# Altium PCB 28Pins_Project_v1I1_PCB.PcbDoc (part 1 of 2)
Units mm, origin at the board's own origin, x right, y up, seen from the top; angles counter-clockwise.
Board outline 68.58 x 53.34 mm, 2 copper layers (Top Layer, Bottom Layer); 106 components, 71 nets, 323 pads, 0 vias.
Unrouted connection lines stored in the file: 231.
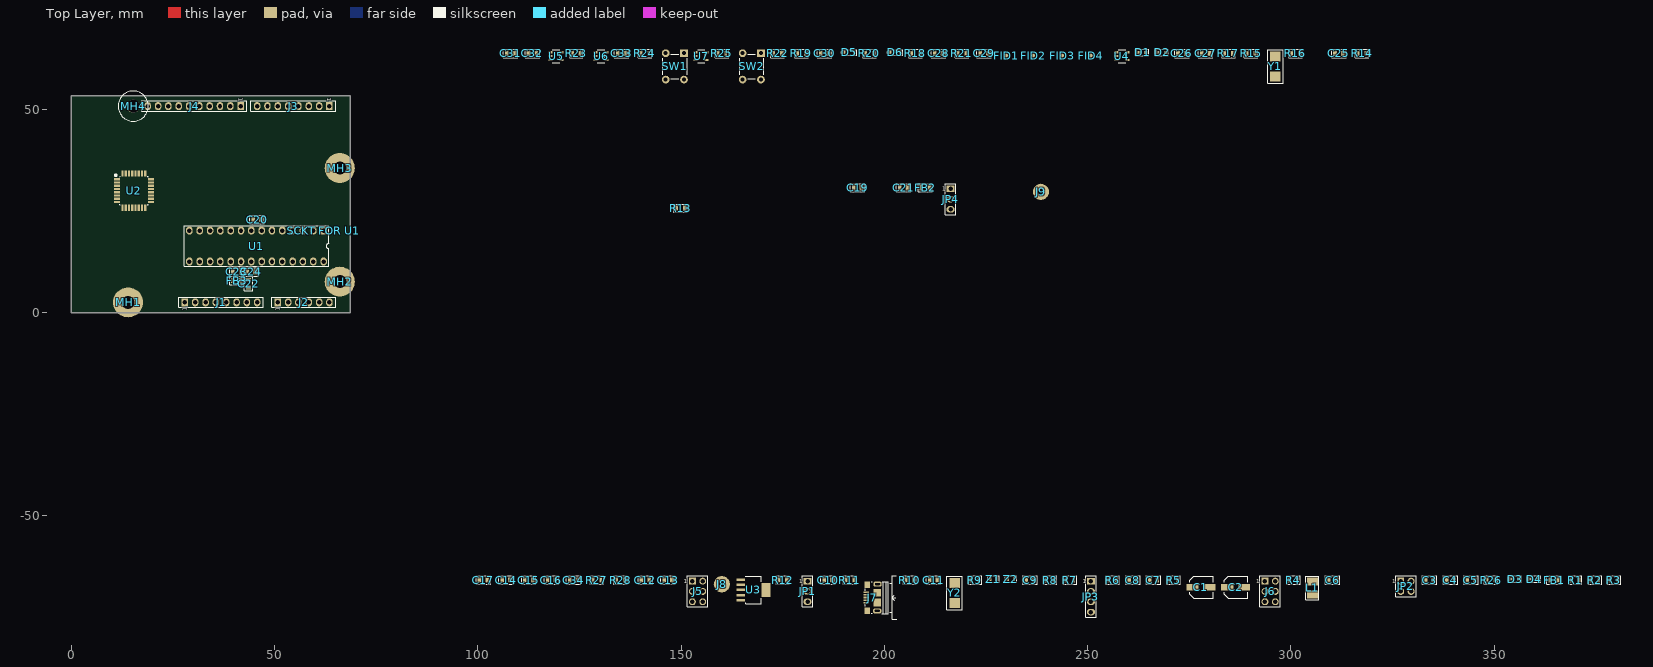
[diagram p0: Top Layer view]
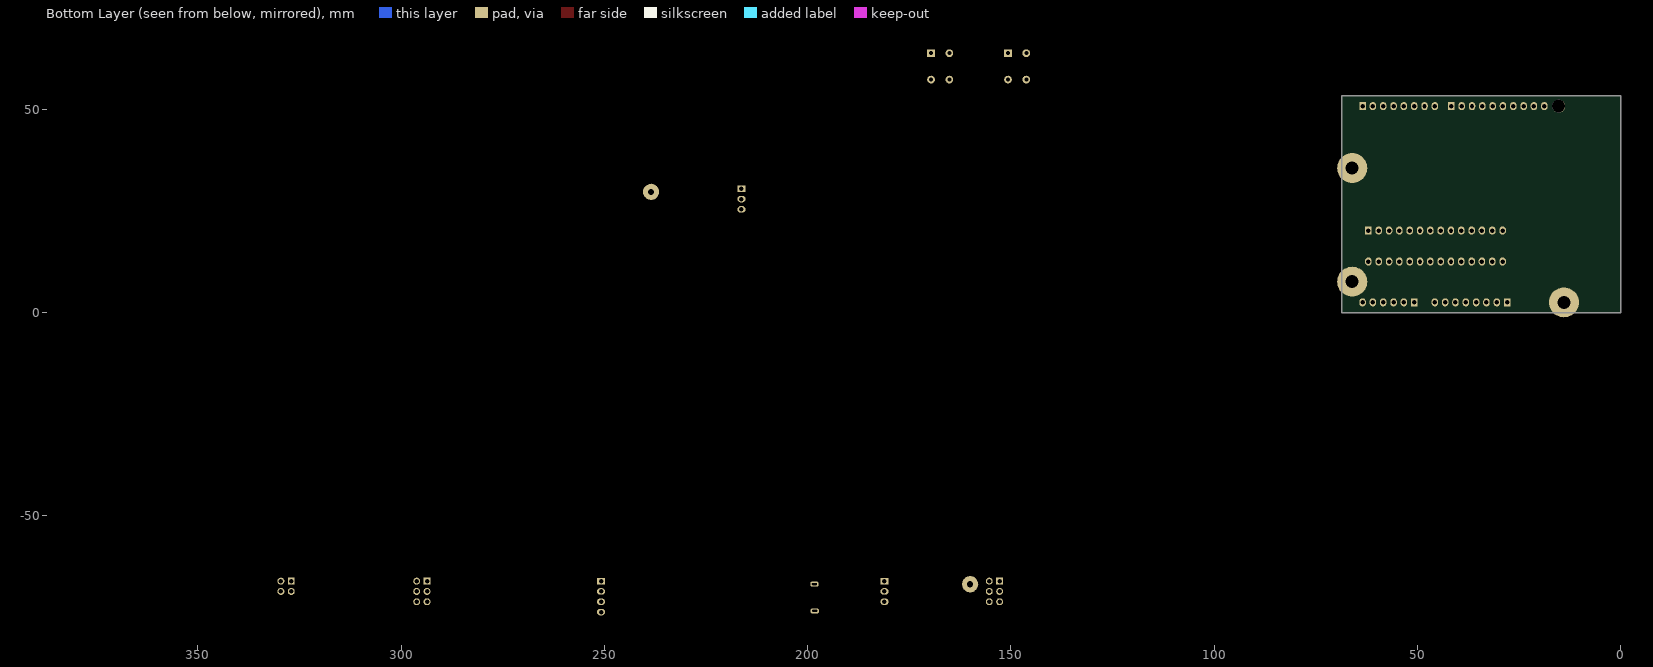
[diagram p1: Bottom Layer view, seen from below]

## Layer stack, top to bottom
Top Solder: solder mask 0.0102, Solder Resist, Dk 3.5
Top Layer: signal copper 0.0356
Dielectric 1: dielectric 0.32, FR-4, Dk 4.8
Bottom Layer: signal copper 0.0356
Bottom Solder: solder mask 0.0102, Solder Resist, Dk 3.5

## Board outline
0,0 68.58,0 68.58,53.34 0,53.34

## Design rules (kind name [scope] priority, off if disabled: settings)
Clearance [All] p1: gap=0.254 ignorepadtopadclearanceinfootprint=FALSE except(0: Arc-Hole Track-Hole SMDPad-Hole THPad-Hole Via-Hole Fill-Hole Poly-Hole Region-Hole Text-Hole)
PolygonConnect [All] p1: connectstyle=Relief reliefconductorwidth=0.254 reliefentries=4 polygonreliefangle="90 Angle" airgapwidth=0.254
RoutingVias [All] p1: holewidth=0.711 width=1.27 viastyle="Through Hole" minholewidth=0.711 minwidth=1.27 maxholewidth=0.711 maxwidth=1.27
SolderMaskExpansion [All] p1: expansion=0.102 istentingtop=FALSE
Width [All] p1: maxlimit=0.254 minlimit=0.254 preferedwidth=0.254
30 further rules are at their usual default settings.

## Components (designator, comment, footprint, x,y, rotation, side; value= is the part's Value field where it differs from the comment)
C1 "100u / 10V" C_ALU_C_SIZE 277.876,-67.564 r0 top
C2 "100u / 10V" C_ALU_C_SIZE 286.385,-67.564 r0 top
C3 "10uF / 16V" C0805 334.137,-65.786 r0 top
C4 "100n" C0805 339.217,-65.786 r0 top
C5 "100n" C0805 344.297,-65.786 r0 top
C6 "100n" C0805 310.261,-65.786 r0 top
C7 "1u" C0805 266.192,-65.786 r0 top
C8 "100n" C0805 261.112,-65.786 r0 top
C9 "18p" C0805 235.839,-65.786 r0 top
C10 "18p" C0805 186.182,-65.786 r0 top
C11 "100n" C0805 212.09,-65.786 r0 top
C12 "10uF / 16V" C0805 141.224,-65.786 r0 top
C13 "10uF / 16V" C0805 146.812,-65.786 r0 top
C14 "100n" C0805 106.934,-65.786 r0 top
C15 "100n" C0805 112.522,-65.786 r0 top
C16 "100n" C0805 118.11,-65.786 r0 top
C17 "100n" C0805 101.346,-65.786 r0 top
C19 "10uF / 16V" C0805 193.421,30.734 r0 top
C20 "100n" C0805 45.7,22.9 r0 top
C21 "10uF / 16V" C0805 204.724,30.734 r0 top
C22 "10uF / 16V" C0805 43.6,7.15 r90 top
C23 "100n" C0805 40.7,10 r0 top
C24 "100n" C0805 44.25,10 r0 top
C25 "18p" C0805 311.785,63.754 r0 top
C26 "100n" C0805 273.177,63.754 r0 top
C27 "18p" C0805 279.019,63.754 r0 top
C28 "100n" C0805 213.36,63.754 r0 top
C29 "100n" C0805 224.536,63.754 r0 top
C30 "100n" C0805 185.293,63.754 r0 top
C31 "100n" C0805 108.077,63.754 r0 top
C32 "100n" C0805 113.411,63.754 r0 top
C33 "100n" C0805 135.382,63.754 r0 top
C34 "10uF / 16V" C0805 123.571,-65.786 r0 top
D1 "Green" LED_0603 263.525,64.008 r0 top
D2 "Orange" LED_0603 268.351,64.008 r0 top
D3 "Orange" LED_0603 355.219,-65.532 r0 top
D4 "Orange" LED_0603 359.918,-65.532 r0 top
D5 "BAT54HT1G" SOD323 191.389,64.008 r0 top
D6 "BAT54HT1G" SOD323 202.692,64.008 r0 top
FB1 "MPZ2012S601AT000" C0805 364.744,-65.786 r0 top
FB2 "MPZ2012S601AT000" C0805 210.058,30.734 r0 top
FB3 "MPZ2012S601AT000" C0805 40.7,7.9 r0 top
FID1 "FID_1MMC" FID_40X120D 229.997,63.246 r0 top
FID2 "FID_1MMC" FID_40X120D 236.601,63.246 r90 top
FID3 "FID_1MMC" FID_40X120D 243.713,63.246 r90 top
FID4 "FID_1MMC" FID_40X120D 250.825,63.246 r90 top
J1 "HDR FMALE 1X8 2.54mm" Hdr_Fmale_1x8_2.54mm 27.94,2.54 r90 top locked
J2 "HDR FMALE 1x6 2.54mm" Hdr_Fmale_1x6_2.54mm 50.8,2.54 r90 top locked
J3 "HDR FMALE 1X8 2.54mm" Hdr_Fmale_1x8_2.54mm 63.5,50.8 r270 top locked
J4 "HDR FMALE 1X10 2.54mm" Hdr_Fmale_1x10_2.54mm 41.656,50.8 r270 top locked
J5 "HDR 2x3" HDR_2x3_2.54MM 152.781,-66.04 r0 top
J6 "HDR 2x3" HDR_2x3_2.54MM 293.624,-66.04 r0 top
J7 "10118193-0001LF" 10118193 195.58,-71.374 r90 top
J8 "4MMx1.5MM" PAD_WITH_HOLE_4MMx1.5MM 160.02,-66.802 r0 top
J9 "4MMx1.5MM" PAD_WITH_HOLE_4MMx1.5MM 238.506,29.718 r0 top
JP1 "HDR 1x3" Hdr_1x3_2.54mm 181.102,-66.04 r0 top
JP2 "HDR 2x2" HDR_2x2_2.54MM 327.025,-66.04 r0 top
JP3 "HDR 1x4" HDR_1x4_2.54MM 250.825,-66.04 r0 top
JP4 "HDR 1x3" Hdr_1x3_2.54mm 216.281,30.48 r0 top
L1 "2u2 / 2A" C1210_IND 305.308,-67.691 r90 top
MH1 "MH_7.4MMC_3.2MMD" MH_7.4MMD_3.2MMD 13.97,2.54 r0 top locked
MH2 "MH_7.4MMC_3.2MMD" MH_7.4MMD_3.2MMD 66.04,7.62 r0 top locked
MH3 "MH_7.4MMC_3.2MMD" MH_7.4MMD_3.2MMD 66.04,35.56 r0 top locked
MH4 "MH_7.4MMNC_3.2MMD" MH_7.4MMD_3.2MMD_NON_COPPER_NPTH 15.24,50.8 r0 top locked
R1 "100k" R0805 369.951,-65.786 r0 top
R2 "560R" R0805 374.777,-65.786 r0 top
R3 "560R" R0805 379.476,-65.786 r0 top
R4 "10k" R0805 300.609,-65.786 r0 top
R5 "22R" R0805 271.145,-65.786 r0 top
R6 "22R" R0805 256.159,-65.786 r0 top
R7 "22R" R0805 245.618,-65.786 r0 top
R8 "0R" R0805 240.792,-65.786 r0 top
R9 "1M" R0805 222.25,-65.786 r0 top
R10 "1k" R0805 206.248,-65.786 r0 top
R11 "1k" R0805 191.516,-65.786 r0 top
R12 "1k" R0805 175.006,-65.786 r0 top
R13 "22R" R0805 149.86,25.654 r0 top
R14 "10k" R0805 317.5,63.754 r0 top
R15 "560R" R0805 290.195,63.754 r0 top
R16 "1M" R0805 301.117,63.754 r0 top
R17 "560R" R0805 284.607,63.754 r0 top
R18 "10k" R0805 207.645,63.754 r0 top
R19 "10k" R0805 179.578,63.754 r0 top
R20 "10k" R0805 196.342,63.754 r0 top
R21 "10k" R0805 219.075,63.754 r0 top
R22 "560R" R0805 173.736,63.754 r0 top
R23 "22R" R0805 124.206,63.754 r0 top
R24 "22R" R0805 141.097,63.754 r0 top
R25 "22R" R0805 160.02,63.754 r0 top
R26 "0R" R0805 349.25,-65.786 r0 top
R27 "0R" R0805 129.286,-65.786 r0 top
R28 "0R" R0805 135.128,-65.786 r0 top
"SCKT FOR U1" "28-DIP Socket" 28_DIP_7.62MM_SOCKET 62.065,20.193 r270 top locked
SW1 "1825910-6" 1825910-6 148.463,60.579 r0 top
SW2 "1825910-6" 1825910-6 167.386,60.579 r0 top
U1 "Component_1" 28_DIP_7.62MM 62.065,20.193 r270 top locked
U2 "ATMEGA16U2-AU" TQFP32 15.4,30 r0 top locked
U3 "TL1963A-33DCQR" "DCQ (R-PDSO-G6)" 167.767,-68.199 r0 top
U4 "SN74AHC1G09DBVR*" DBV_SOT_23_5 258.445,63.119 r0 top
U5 "SN74AHC1G09DBVR*" DBV_SOT_23_5 119.253,63.119 r0 top
U6 "SN74AHC1G09DBVR*" DBV_SOT_23_5 130.302,63.119 r0 top
U7 "SN74AHC1G09DBVR*" DBV_SOT_23_5 154.94,63.119 r0 top
Y1 "ABM7-16.000MHZ-D2Y-T" ABM7_v1_1_BIG 296.164,60.579 r90 top
Y2 "ABM7-16.000MHZ-D2Y-T" ABM7_v1_1_BIG 217.297,-68.961 r90 top
Z1 "CG0603MLC-05E" R0603 226.822,-65.532 r0 top
Z2 "CG0603MLC-05E" R0603 231.14,-65.532 r0 top

## Footprints (in the part's own frame and the unit in brackets; to place one, negate y for a bottom-side part, rotate by r counter-clockwise, add the part's x,y. Pads: shape width x height; smd on the part's side, far side on the other; paste and mask are expansions set on the pad)
28_DIP_7.62MM [mm]
  rect 2x1.6 hole 1.1: 1(0,0)
  oval 2x1.6 hole 1.1: 2(0,-2.54) 3(0,-5.08) 4(0,-7.62) 5(0,-10.16) 6(0,-12.7) 7(0,-15.24) 8(0,-17.78) 9(0,-20.32) 10(0,-22.86) 11(0,-25.4) 12(0,-27.94) 13(0,-30.48) 14(0,-33.02) 15(7.62,-33.02) 16(7.62,-30.48) 17(7.62,-27.94) 18(7.62,-25.4) 19(7.62,-22.86) 20(7.62,-20.32) 21(7.62,-17.78) 22(7.62,-15.24) 23(7.62,-12.7) 24(7.62,-10.16) 25(7.62,-7.62) 26(7.62,-5.08) 27(7.62,-2.54) 28(7.62,0)
  silkscreen extent -1.19,-34.31 8.81,1.29, body extent -0.13,-34.41 7.75,1.53, height 7.55
28_DIP_7.62MM_SOCKET [mm]
  body extent -1.24,-34.16 8.86,1.34, height 4.2
1825910-6 [mm]
  rect 1.9x1.9 hole 1: 1(2.25,3.25)
  round 1.9 hole 1: 2(2.25,-3.25) 3(-2.25,3.25) 4(-2.25,-3.25)
  silkscreen extent -3,-3 3,3, body extent -2.99,-3.8 3,4, height 5
10118193 [mm]
  rect 0.4x1.35 smd mask+0.05: 1(0,0) 2(0.65,0) 3(1.3,0) 4(1.95,0) 5(2.6,0)
  rect 1.6x1.4 smd: 6(-1.9,-0.225) 7(4.5,-0.225)
  rrect60% 1.2x2 hole 0.5 slot 1.2 at 90 deg: 8(-2,-2.675) 9(4.6,-2.765)
  rect 1.9x1.9 smd: 10(0.1,-2.675) 11(2.5,-2.675)
  silkscreen extent -4.1,-7.5 6.6,0.3, body extent -2.63,-5.41 5.23,0.25, height 2.87
ABM7_v1_1_BIG [mm]
  rect 2.5x2.6 smd: 1(-2.45,0) 2(2.45,0)
  silkscreen extent -4.1,-1.9 4.1,1.9, body extent -3,-1.75 3,1.75, height 1.45
C0805 [mm]
  rect 0.9x1.3 smd: 1(-0.95,0) 2(0.95,0)
  silkscreen extent -1.78,-1.02 1.78,1.02, body extent -1,-0.6 1,0.6, height 1.45
C1210_IND [mm]
  rect 2x2.7 smd: 1(-1.6,0) 2(1.6,0)
  silkscreen extent -2.9,-1.6 2.9,1.6, body extent -1.6,-1.25 1.6,1.25, height 2.7
C_ALU_C_SIZE [mm]
  rect 3x1.6 smd: 1(-2.05,0) 2(2.05,0)
  silkscreen extent -2.75,-2.75 3,2.75, body extent -2.95,-2.65 2.95,2.65, height 5.41
DBV_SOT_23_5 [mm]
  rect 1x0.55 smd: 1(-1.35,0.95) 2(-1.35,0) 3(-1.35,-0.95) 4(1.35,-0.95) 5(1.35,0.95)
  silkscreen extent -0.9,-1.6 0.9,1.6, body extent -1.51,-1.52 1.51,1.53, height 1.61
"DCQ (R-PDSO-G6)" [mm]
  rect 2.2x0.6 smd: 1(-3.1,2.54) 2(-3.1,1.27) 3(-3.1,0) 4(-3.1,-1.27) 5(-3.1,-2.54)
  rect 2.2x3.5 smd: 6(3.1,0)
  silkscreen extent -1.9,-3.4 1.9,3.4, body extent -3.63,-3.28 3.63,3.28, height 1.79
FID_40X120D [mil]
  round 40 smd paste-1574.8 mask+40: 1(0,0)
Hdr_1x3_2.54mm [mm]
  rect 2x1.6 hole 1.1: 1(0,0)
  oval 2x1.6 hole 1.1: 2(0,-2.54) 3(0,-5.08)
  silkscreen extent -1.27,-6.35 1.27,1.27, body extent -1.2,-6.15 1.2,1.07, height 8.39
HDR_1x4_2.54MM [mm]
  rect 2x1.6 hole 1.1: 1(0,0)
  oval 2x1.6 hole 1.1: 2(0,-2.54) 3(0,-5.08) 4(0,-7.62)
  silkscreen extent -1.27,-8.89 1.27,1.27, body extent -1.2,-8.69 1.2,1.07, height 8.39
HDR_2x2_2.54MM [mm]
  rect 1.7x1.7 hole 1.1: 1(0,0)
  round 1.7 hole 1.1: 2(2.54,0) 3(0,-2.54) 4(2.54,-2.54)
  silkscreen extent -1.27,-3.81 3.81,1.27, body extent -1.23,-3.81 3.77,1.27, height 8.01
HDR_2x3_2.54MM [mm]
  rect 1.7x1.7 hole 1.1: 1(0,0)
  round 1.7 hole 1.1: 2(2.54,0) 3(0,-2.54) 4(2.54,-2.54) 5(0,-5.08) 6(2.54,-5.08)
  silkscreen extent -1.27,-6.35 3.81,1.27, body extent -1.23,-6.35 3.77,1.27, height 8.01
Hdr_Fmale_1x6_2.54mm [mm]
  rect 2x1.6 hole 1.1: 1(0,0)
  oval 2x1.6 hole 1.1: 2(0,-2.54) 3(0,-5.08) 4(0,-7.62) 5(0,-10.16) 6(0,-12.7)
  silkscreen extent -1.27,-14.22 1.27,1.52, body extent -1.25,-14.17 1.25,1.47, height 8.51
Hdr_Fmale_1x8_2.54mm [mm]
  rect 2x1.6 hole 1.1: 1(0,0)
  oval 2x1.6 hole 1.1: 2(0,-2.54) 3(0,-5.08) 4(0,-7.62) 5(0,-10.16) 6(0,-12.7) 7(0,-15.24) 8(0,-17.78)
  silkscreen extent -1.27,-19.3 1.27,1.52, body extent -1.25,-19.25 1.25,1.47, height 8.51
Hdr_Fmale_1x10_2.54mm [mm]
  rect 2x1.6 hole 1.1: 1(0,0)
  oval 2x1.6 hole 1.1: 2(0,-2.54) 3(0,-5.08) 4(0,-7.62) 5(0,-10.16) 6(0,-12.7) 7(0,-15.24) 8(0,-17.78) 9(0,-20.32) 10(0,-22.86)
  silkscreen extent -1.27,-24.33 1.27,1.52, body extent -1.25,-24.33 1.25,1.47, height 8.51
LED_0603 [mm]
  rect 0.8x0.8 smd: 1(-0.8,0) 2(0.8,0)
  silkscreen extent -1.78,-0.76 1.52,0.76, body extent -0.85,-0.4 0.85,0.4, height 0.66
MH_7.4MMD_3.2MMD [mm]
  round 7.4 hole 3.2: 1(0,0)
MH_7.4MMD_3.2MMD_NON_COPPER_NPTH [mm]
  round 3.2 hole 3.2 unplated: 1(0,0)
  silkscreen extent -3.7,-3.7 3.7,3.7
PAD_WITH_HOLE_4MMx1.5MM [mm]
  round 4 hole 1.5: 1(0,0)
R0603 [mm]
  rect 0.6x0.9 smd: 1(-0.75,0) 2(0.75,0)
  silkscreen extent -1.4,-0.76 1.4,0.76, body extent -0.8,-0.4 0.8,0.4, height 0.85
R0805 [mm]
  rect 0.7x1.3 smd: 1(-0.95,0) 2(0.95,0)
  silkscreen extent -1.65,-1.02 1.65,1.02, body extent -1,-0.6 1,0.6, height 0.71
SOD323 [mil]
  rect 22x27 smd: 1(-48,0) 2(48,0)
  silkscreen extent -79,-28 71,28, body extent -49,-25 49,25, height 39
TQFP32 [mm]
  rect 1.5x0.55 smd mask+0.06: 1(-4.2,2.8) 2(-4.2,2) 3(-4.2,1.2) 4(-4.2,0.4) 5(-4.2,-0.4) 6(-4.2,-1.2) 7(-4.2,-2) 8(-4.2,-2.8) 17(4.2,-2.8) 18(4.2,-2) 19(4.2,-1.2) 20(4.2,-0.4) 21(4.2,0.4) 22(4.2,1.2) 23(4.2,2) 24(4.2,2.8)
  rect 0.55x1.5 smd mask+0.06: 9(-2.8,-4.2) 10(-2,-4.2) 11(-1.2,-4.2) 12(-0.4,-4.2) 13(0.4,-4.2) 14(1.2,-4.2) 15(2,-4.2) 16(2.8,-4.2) 25(2.8,4.2) 26(2,4.2) 27(1.2,4.2) 28(0.4,4.2) 29(-0.4,4.2) 30(-1.2,4.2) 31(-2,4.2) 32(-2.8,4.2)
  silkscreen extent -4.65,-3.5 3.5,4, body extent -4.6,-4.6 4.6,4.6, height 1.2

## Part data
C1 C2: library part EEE-1AA101WR, "CAP ALUM 100UF 20% 10V SMD", Capacitance=100uF, Case/Package=Radial, Manufacturer=Panasonic, Max Operating Temperature=85°C, Min Operating Temperature=-40°C, Package Quantity=1, Ripple Current=50mA, Supplier Part Number 1=PCE3867CT-ND, Tolerance=20%, Voltage Rating=10V, Category="Aluminum Electrolytic Capacitors", ComponentLink1Description=https://datasheet.ciiva.com/26945/getdatasheetpartid-169213-26945071.pdf?src-supplier=Verical, ComponentLink1URL=https://datasheet.ciiva.com/26945/getdatasheetpartid-169213-26945071.pdf?src-supplier=Verical, ComponentLink2Description=https://datasheet.ciiva.com/2983/aba0000ce2-2983906.pdf?src-supplier=Avnet, ComponentLink2URL=https://datasheet.ciiva.com/2983/aba0000ce2-2983906.pdf?src-supplier=Avnet, ComponentLink3Description=https://datasheet.ciiva.com/11673/aba0000ce2-11673882.pdf?src-supplier=Avnet, ComponentLink3URL=https://datasheet.ciiva.com/11673/aba0000ce2-11673882.pdf?src-supplier=Avnet, ComponentLink4Description=https://datasheet.ciiva.com/24027/aba0000ce2-40801-24027541.pdf?src-supplier=Mouser, ComponentLink4URL=https://datasheet.ciiva.com/24027/aba0000ce2-40801-24027541.pdf?src-supplier=Mouser, ComponentLink5Description=https://datasheet.ciiva.com/30075/11aba0000ce2-30075303.pdf?src-supplier=Onlinecomponents.com, ComponentLink5URL=https://datasheet.ciiva.com/30075/11aba0000ce2-30075303.pdf?src-supplier=Onlinecomponents.com, ComponentLink6Description=https://datasheet.ciiva.com/16427/aba0000ce2-16427544.pdf?src-supplier=Future+Electronics, ComponentLink6URL=https://datasheet.ciiva.com/16427/aba0000ce2-16427544.pdf?src-supplier=Future+Electronics, ComponentLink7Description=https://datasheet.ciiva.com/14598/70255710-14598233.pdf?src-supplier=Allied+Electronics, ComponentLink7URL=https://datasheet.ciiva.com/14598/70255710-14598233.pdf?src-supplier=Allied+Electronics, ComponentLink8Description=https://datasheet.ciiva.com/14605/70255710-14605689.pdf?src-supplier=Allied+Electronics, ComponentLink8URL=https://datasheet.ciiva.com/14605/70255710-14605689.pdf?src-supplier=Allied+Electronics, Construction=Cylindrical, Contact Plating=Tin, Diameter=5mm, Height=5.4mm, Height - Seated (Max)=0.213inch, Lead Free="Lead Free", Length=5.5mm, Life (Hours)=1000Hour, Manufacturer Part Number=EEE-1AA101WR, Mount="Surface Mount,PCB", Packaging="Tape and Reel", Pricing 1="1=0,39000, 10=0,26600, 50=0,17720, 100=0,15050, 500=0,10626 (USD)", Radiation Hardening=No, REACH SVHC=Unknown, Ripple Current (AC)=50mA, RoHS=Yes, RoHS Compliant=Yes, Series=S, Supplier 1=Digi-Key, Termination=SMD/SMT, Voltage Rating (DC)=10V
C3 C12 C13 C19 C21 C22 C34: library part C2012X5R1C106M125AC, "CAP CER 10UF 16V X5R 0805", Capacitance=10uF, Case Code (Imperial)=0805, Case Code (Metric)=2012, Dielectric=X5R, Dielectric Material=Ceramic, Manufacturer=TDK, Max Operating Temperature=85°C, Min Operating Temperature=-55°C, Package Quantity=1, Supplier Part Number 1=445-4115-1-ND, Tolerance=20%, Voltage Rating=16V, Case/Package=0805, Category="Ceramic Capacitors", ComponentLink1Description=https://datasheet.ciiva.com/6252/tdkmlcccaprange-6252105.pdf?src-supplier=Digi-Key, ComponentLink1URL=https://datasheet.ciiva.com/6252/tdkmlcccaprange-6252105.pdf?src-supplier=Digi-Key, ComponentLink2Description=https://datasheet.ciiva.com/6252/tdkmlcccaprange-6252108.pdf?src-supplier=Digi-Key, ComponentLink2URL=https://datasheet.ciiva.com/6252/tdkmlcccaprange-6252108.pdf?src-supplier=Digi-Key, ComponentLink3Description=https://datasheet.ciiva.com/6289/tdkmlcccaprange-6289238.pdf?src-supplier=Digi-Key, ComponentLink3URL=https://datasheet.ciiva.com/6289/tdkmlcccaprange-6289238.pdf?src-supplier=Digi-Key, ComponentLink4Description=https://datasheet.ciiva.com/22725/1913358-22725558.pdf?src-supplier=Element14, ComponentLink4URL=https://datasheet.ciiva.com/22725/1913358-22725558.pdf?src-supplier=Element14, ComponentLink5Description=https://datasheet.ciiva.com/23803/1796654-23803022.pdf?src-supplier=Newark, ComponentLink5URL=https://datasheet.ciiva.com/23803/1796654-23803022.pdf?src-supplier=Newark, Depth=1.25mm, Height=1.25mm, Lead Free="Lead Free", Length=0.079inch, Manufacturer Part Number=C2012X5R1C106M125AC, Mount="Surface Mount", Number of Pins=2, Packaging="Tape and Reel", REACH SVHC="No SVHC", Resistor Type=Ceramic, RoHS=Yes, RoHS Compliant=Yes, Series=C, Supplier 1=Digi-Key, Termination=SMD/SMT, Thickness=0.057inch, Voltage Rating (DC)=16V, Weight=0.000194oz, Width=0.049inch
C4 C5 C6 C8 C11 C14 C15 C16 C17 C20 C23 C24 C26 C28 C29 C30 C31 C32 C33: library part C2012X7R1H104K085AA, "CAP CER 0.1UF 50V X7R 0805", Capacitance=100nF, Case Code (Imperial)=0805, Case Code (Metric)=2012, Dielectric=X7R, Dielectric Material=Ceramic, Manufacturer 1=TDK, Max Operating Temperature=125°C, Min Operating Temperature=-55°C, Package Quantity=1, Supplier Part Number 1=445-7534-1-ND, Tolerance=10%, Voltage=50V, Case/Package=0805, ComponentLink1Description=https://datasheet.ciiva.com/11788/0900766b80c1bb00-11788128.pdf?src-supplier=RSComponents, ComponentLink1URL=https://datasheet.ciiva.com/11788/0900766b80c1bb00-11788128.pdf?src-supplier=RSComponents, ComponentLink2Description=https://datasheet.ciiva.com/6250/tdkmlcccaprange-6250821.pdf?src-supplier=Digi-Key, ComponentLink2URL=https://datasheet.ciiva.com/6250/tdkmlcccaprange-6250821.pdf?src-supplier=Digi-Key, ComponentLink3Description=https://datasheet.ciiva.com/6250/tdkmlcccaprange-6250824.pdf?src-supplier=Digi-Key, ComponentLink3URL=https://datasheet.ciiva.com/6250/tdkmlcccaprange-6250824.pdf?src-supplier=Digi-Key, ComponentLink4Description=https://datasheet.ciiva.com/24191/e412-c-24191447.pdf?src-supplier=Future+Electronics, ComponentLink4URL=https://datasheet.ciiva.com/24191/e412-c-24191447.pdf?src-supplier=Future+Electronics, ComponentLink5Description=https://datasheet.ciiva.com/23803/1796654-23803035.pdf?src-supplier=Newark, ComponentLink5URL=https://datasheet.ciiva.com/23803/1796654-23803035.pdf?src-supplier=Newark, ComponentLink6Description=https://datasheet.ciiva.com/28602/1571323-28602204.pdf?src-supplier=Element14, ComponentLink6URL=https://datasheet.ciiva.com/28602/1571323-28602204.pdf?src-supplier=Element14, Construction=Flat, Depth=1.25mm, Height=0.85mm, Lead Free="Lead Free", Length=2mm, Manufacturer Part Number 1=C2012X7R1H104K085AA, Mount="Surface Mount", Number of Pins=2, Packaging="Tape and Reel", Pricing 1="1=0.15000, 10=0.10900, 50=0.06160, 100=0.05100, 500=0.03578, 1000=0.02962 (USD)", Radiation Hardening=No, REACH SVHC="No SVHC", Resistor Type=Ceramic, RoHS=Yes, RoHS Compliant=Yes, Series=C, Stock 1=36530, Supplier 1=Digi-Key, Termination=SMD/SMT, Thickness=0.037inch, Voltage Rating=50V, Voltage Rating (DC)=50V, Weight=0.000194oz, Width=0.049inch
C7: library part C2012X5R1E105K125AA, "CAP CER 1UF 25V X5R 0805", Capacitance=1uF, Case Code (Imperial)=0805, Case Code (Metric)=2012, Dielectric=X5R, Dielectric Material=Ceramic, Manufacturer=TDK, Max Operating Temperature=85°C, Min Operating Temperature=-55°C, Package Quantity=2000, Supplier Part Number 1=445-1419-1-ND, Tolerance=10%, Voltage=25V, Case/Package=0805, Category="Ceramic Capacitors", ComponentLink1Description=https://datasheet.ciiva.com/11787/0900766b80c1bb00-11787608.pdf?src-supplier=RSComponents, ComponentLink1URL=https://datasheet.ciiva.com/11787/0900766b80c1bb00-11787608.pdf?src-supplier=RSComponents, ComponentLink2Description=https://datasheet.ciiva.com/28602/1744655-28602171.pdf?src-supplier=Element14, ComponentLink2URL=https://datasheet.ciiva.com/28602/1744655-28602171.pdf?src-supplier=Element14, ComponentLink3Description=https://datasheet.ciiva.com/15192/getdatasheetpartid-726707-15192140.pdf?src-supplier=Verical, ComponentLink3URL=https://datasheet.ciiva.com/15192/getdatasheetpartid-726707-15192140.pdf?src-supplier=Verical, ComponentLink4Description=https://datasheet.ciiva.com/16449/e412-c-16449595.pdf?src-supplier=Future+Electronics, ComponentLink4URL=https://datasheet.ciiva.com/16449/e412-c-16449595.pdf?src-supplier=Future+Electronics, Construction=Flat, Depth=1.25mm, Height=1.25mm, Lead Free="Lead Free", Length=2mm, Manufacturer Part Number=C2012X5R1E105K125AA, Mount="Surface Mount", Number of Pins=2, Packaging="Tape and Reel", Pricing 1="1=0,24000, 10=0,16600, 50=0,09940, 100=0,08390, 500=0,05740, 1000=0,05078 (USD)", Radiation Hardening=No, REACH SVHC="No SVHC", Resistor Type=Ceramic, RoHS=Yes, RoHS Compliant=Yes, Series=C, Stock 1=14275, Supplier 1=Digi-Key, Termination=SMD/SMT, Thickness=0.057inch, Voltage Rating=25V, Voltage Rating (DC)=25V, Weight=0.000194oz, Width=0.049inch
C9 C10 C25 C27: library part C0805C180J5GACTU, "CAP CER 18PF 50V C0G/NP0 0805", Capacitance=18pF, Case Code (Imperial)=0805, Case Code (Metric)=2012, Dielectric=C0G, Dielectric Material=Ceramic, Manufacturer=KEMET, Max Operating Temperature=125°C, Min Operating Temperature=-55°C, Package Quantity=1, Supplier Part Number 1=399-1112-1-ND, Temperature Coefficient=30ppm/°C, Tolerance=5%, Voltage=50V, Case/Package=0805, Category="Ceramic Capacitors", ComponentLink1Description=https://datasheet.ciiva.com/22746/1769375-22746770.pdf?src-supplier=Element14, ComponentLink1URL=https://datasheet.ciiva.com/22746/1769375-22746770.pdf?src-supplier=Element14, ComponentLink2Description=https://datasheet.ciiva.com/26923/getdatasheetpartid-759702-26923980.pdf?src-supplier=Verical, ComponentLink2URL=https://datasheet.ciiva.com/26923/getdatasheetpartid-759702-26923980.pdf?src-supplier=Verical, ComponentLink3Description=https://datasheet.ciiva.com/26847/getdatasheetpartid-385668-26847862.pdf?src-supplier=Verical, ComponentLink3URL=https://datasheet.ciiva.com/26847/getdatasheetpartid-385668-26847862.pdf?src-supplier=Verical, Construction=Flat, Contact Material=Tin, Contact Plating=Tin,Matte, Depth=1.25mm, Dissipation Factor=0.1%, Height=0.78mm, Lead Free="Lead Free", Lead Pitch=0.75mm, Length=2mm, Manufacturer Part Number=C0805C180J5GACTU, Mount="Surface Mount,PCB", Number of Pins=2, Packaging="Tape and Reel", Pricing 1="1=0,13000, 10=0,09000, 50=0,05140, 100=0,04250, 500=0,02982, 1000=0,02468 (USD)", Radiation Hardening=No, REACH SVHC="No SVHC", RoHS=Yes, RoHS Compliant=Yes, Series=C, Stock 1=9655, Supplier 1=Digi-Key, Termination=SMD/SMT, Thickness=0.035inch, Voltage Rating=50V, Voltage Rating (DC)=50V, Width=1.2mm
D1: library part LGL29K-G2J1-24-Z, "LED GREEN DIFFUSED 0603 SMD", Case Code (Imperial)=0603, Case Code (Metric)=1608, Forward Current=20mA, Forward Voltage=2.2V, Lens Color=White, Manufacturer="Osram Opto", Max Operating Temperature=100°C, Min Operating Temperature=-40°C, Package Quantity=5000, Reverse Voltage=12V, Supplier Part Number 1=475-2709-1-ND, Test Current=2mA, Case/Package=0603, Category=Uncategorized, Color=Green, ComponentLink1Description=https://datasheet.ciiva.com/4689/g-l29k-39844-4689584.pdf?src-supplier=Mouser, ComponentLink1URL=https://datasheet.ciiva.com/4689/g-l29k-39844-4689584.pdf?src-supplier=Mouser, ComponentLink2Description=https://datasheet.ciiva.com/15198/getdatasheetpartid-571127-15198411.pdf?src-supplier=Verical, ComponentLink2URL=https://datasheet.ciiva.com/15198/getdatasheetpartid-571127-15198411.pdf?src-supplier=Verical, ComponentLink3Description=https://datasheet.ciiva.com/2112/00077107-0-2112886.pdf?src-supplier=Digi-Key, ComponentLink3URL=https://datasheet.ciiva.com/2112/00077107-0-2112886.pdf?src-supplier=Digi-Key, ComponentLink4Description=https://datasheet.ciiva.com/2112/00077107-0-2112887.pdf?src-supplier=Digi-Key, ComponentLink4URL=https://datasheet.ciiva.com/2112/00077107-0-2112887.pdf?src-supplier=Digi-Key, ComponentLink5Description=https://datasheet.ciiva.com/2112/00077107-0-2112888.pdf?src-supplier=Digi-Key, ComponentLink5URL=https://datasheet.ciiva.com/2112/00077107-0-2112888.pdf?src-supplier=Digi-Key, Depth=0.8mm, Dominant Wavelength=570nm, Height=0.65mm, Illumination Color=Green, Length=1.3mm, Lens Size=0.8mm, Lens Style=Flat,Diffused,Colorless,Rectangular, Lens Transparency=Diffused, Luminous Flux=0.012lm, Luminous Intensity=5.6mcd, Manufacturer Part Number=LGL29K-G2J1-24-Z, Mount="Surface Mount", Number of Elements=1, Number of LEDs=1, Number of Pins=2, Packaging="Tape and Reel", Pricing 1="1=0.47000, 10=0.31000, 100=0.20710, 500=0.14322, 1000=0.11936, 2000=0.10742 (USD)", Radiation Hardening=No, RoHS=Yes, RoHS Compliant=Yes, Series=SmartLED, Supplier 1=Digi-Key, Viewing Angle=160°, Width=0.8mm
D2 D3 D4: library part LOL29K-H2K1-24-Z, "LED ORANGE DIFFUSED 0603 SMD", Case Code (Imperial)=0603, Case Code (Metric)=1608, Forward Current=20mA, Forward Voltage=2.2V, Lens Color=White, Manufacturer="Osram Opto", Max Operating Temperature=100°C, Min Operating Temperature=-40°C, Package Quantity=5000, Reverse Voltage=12V, Supplier Part Number 1=475-2740-1-ND, Test Current=2mA, Case/Package=0603, Category=Uncategorized, Color=Orange, ComponentLink1Description=https://datasheet.ciiva.com/2112/00077105-0-2112905.pdf?src-supplier=Digi-Key, ComponentLink1URL=https://datasheet.ciiva.com/2112/00077105-0-2112905.pdf?src-supplier=Digi-Key, ComponentLink2Description=https://datasheet.ciiva.com/2112/00077105-0-2112904.pdf?src-supplier=Digi-Key, ComponentLink2URL=https://datasheet.ciiva.com/2112/00077105-0-2112904.pdf?src-supplier=Digi-Key, ComponentLink3Description=https://datasheet.ciiva.com/2112/00077105-0-2112906.pdf?src-supplier=Digi-Key, ComponentLink3URL=https://datasheet.ciiva.com/2112/00077105-0-2112906.pdf?src-supplier=Digi-Key, ComponentLink4Description=https://datasheet.ciiva.com/15198/getdatasheetpartid-693885-15198412.pdf?src-supplier=Verical, ComponentLink4URL=https://datasheet.ciiva.com/15198/getdatasheetpartid-693885-15198412.pdf?src-supplier=Verical, Depth=0.8mm, Dominant Wavelength=606nm, Height=0.65mm, Illumination Color=Orange, Length=1.3mm, Lens Size=0.8mm, Lens Style=Flat,Diffused,Colorless,Rectangular, Lens Transparency=Diffused, Luminous Flux=0.025lm, Luminous Intensity=9mcd, Manufacturer Part Number=LOL29K-H2K1-24-Z, Mount="Surface Mount", Number of Elements=1, Number of LEDs=1, Number of Pins=2, Packaging="Tape and Reel", Radiation Hardening=No, RoHS=Yes, RoHS Compliant=Yes, Series=SmartLED, Supplier 1=Digi-Key, Viewing Angle=160°, Width=0.8mm
D5 D6: "DIODE SCHOTTKY 30V 200MA SOD3223", Average Rectified Current=200mA, Capacitance=10pF, Forward Voltage=800mV, Manufacturer="ON Semiconductor / Fairchild", Max Forward Surge Current (Ifsm)=600mA, Max Operating Temperature=150°C, Max Repetitive Reverse Voltage (Vrrm)=30V, Max Reverse Current=2uA, Min Operating Temperature=-55°C, Package Quantity=3000, Power Dissipation=200mW, Supplier Part Number 1=BAT54HT1GCT-ND, Category="Schottky Diodes", ComponentLink1Description=https://datasheet.ciiva.com/4714/bat54ht1-d-72881-4714706.pdf?src-supplier=Mouser, ComponentLink1URL=https://datasheet.ciiva.com/4714/bat54ht1-d-72881-4714706.pdf?src-supplier=Mouser, ComponentLink2Description=https://datasheet.ciiva.com/1240/1747983-1240762.pdf?src-supplier=Newark, ComponentLink2URL=https://datasheet.ciiva.com/1240/1747983-1240762.pdf?src-supplier=Newark, ComponentLink3Description=https://datasheet.ciiva.com/30479/0900766b811a63a9-30479442.pdf?src-supplier=RSComponents, ComponentLink3URL=https://datasheet.ciiva.com/30479/0900766b811a63a9-30479442.pdf?src-supplier=RSComponents, ComponentLink4Description=https://datasheet.ciiva.com/4452/bat54ht1g-104602-4452889.pdf?src-supplier=Mouser, ComponentLink4URL=https://datasheet.ciiva.com/4452/bat54ht1g-104602-4452889.pdf?src-supplier=Mouser, ComponentLink5Description=https://datasheet.ciiva.com/34301/806549-34301562.pdf?src-supplier=Jameco, ComponentLink5URL=https://datasheet.ciiva.com/34301/806549-34301562.pdf?src-supplier=Jameco, ComponentLink6Description=https://datasheet.ciiva.com/915/bat54ht1-d-915445.pdf?src-supplier=Digi-Key, ComponentLink6URL=https://datasheet.ciiva.com/915/bat54ht1-d-915445.pdf?src-supplier=Digi-Key, ComponentLink7Description=https://datasheet.ciiva.com/8294/bat54ht1-d-8294645.pdf?src-supplier=Avnet, ComponentLink7URL=https://datasheet.ciiva.com/8294/bat54ht1-d-8294645.pdf?src-supplier=Avnet, ComponentLink8Description=https://datasheet.ciiva.com/8303/bat54ht1g-8303645.pdf?src-supplier=Avnet, ComponentLink8URL=https://datasheet.ciiva.com/8303/bat54ht1g-8303645.pdf?src-supplier=Avnet, ComponentLink9Description=https://datasheet.ciiva.com/915/bat54ht1-d-915443.pdf?src-supplier=Digi-Key, ComponentLink9URL=https://datasheet.ciiva.com/915/bat54ht1-d-915443.pdf?src-supplier=Digi-Key, ComponentLink10Description=https://datasheet.ciiva.com/17020/bat54ht1g-17020445.pdf?src-supplier=Future+Electronics, ComponentLink10URL=https://datasheet.ciiva.com/17020/bat54ht1g-17020445.pdf?src-supplier=Future+Electronics, ComponentLink11Description=https://datasheet.ciiva.com/910/bat54ht1g-910499.pdf?src-supplier=Digi-Key, ComponentLink11URL=https://datasheet.ciiva.com/910/bat54ht1g-910499.pdf?src-supplier=Digi-Key, ComponentLink12Description=https://datasheet.ciiva.com/910/bat54ht1g-910498.pdf?src-supplier=Digi-Key, ComponentLink12URL=https://datasheet.ciiva.com/910/bat54ht1g-910498.pdf?src-supplier=Digi-Key, ComponentLink13Description=https://datasheet.ciiva.com/46429/1727620-46429206.pdf?src-supplier=Element14, ComponentLink13URL=https://datasheet.ciiva.com/46429/1727620-46429206.pdf?src-supplier=Element14, ComponentLink14Description=https://datasheet.ciiva.com/1180/bat54ht1-d-1180251.pdf?src-supplier=Element14, ComponentLink14URL=https://datasheet.ciiva.com/1180/bat54ht1-d-1180251.pdf?src-supplier=Element14, ComponentLink15Description=https://datasheet.ciiva.com/1180/bat54ht1-d-1180252.pdf?src-supplier=Element14, ComponentLink15URL=https://datasheet.ciiva.com/1180/bat54ht1-d-1180252.pdf?src-supplier=Element14, ComponentLink16Description=https://datasheet.ciiva.com/915/bat54ht1-d-915444.pdf?src-supplier=Digi-Key, ComponentLink16URL=https://datasheet.ciiva.com/915/bat54ht1-d-915444.pdf?src-supplier=Digi-Key, ComponentLink17Description=https://datasheet.ciiva.com/910/bat54ht1g-910497.pdf?src-supplier=Digi-Key, ComponentLink17URL=https://datasheet.ciiva.com/910/bat54ht1g-910497.pdf?src-supplier=Digi-Key, ComponentLink18Description=https://datasheet.ciiva.com/48686/001262925-da-01-en-diode-schottky-30v-bat54ht1g-sod-323-fsc-48686266.pdf?src-supplier=Conrad, ComponentLink18URL=https://datasheet.ciiva.com/48686/001262925-da-01-en-diode-schottky-30v-bat54ht1g-sod-323-fsc-48686266.pdf?src-supplier=Conrad, Contact Plating=Tin,Matte, Current Rating=200mA, Element Configuration=Single, Forward Current=200mA, Height=1mm, Lead Free="Lead Free", Length=1.8mm, Manufacturer Part Number=BAT54HT1G, Max Reverse Leakage Current=2uA, Max Reverse Voltage (DC)=30V, Max Surge Current=600mA, Mount="Surface Mount", Number of Pins=2, Output Current=200mA, Packaging="Tape and Reel", Peak Non-Repetitive Surge Current=600mA, Polarity=Standard, Radiation Hardening=No, REACH SVHC="No SVHC", Recovery Time=5ns, Reverse Recovery Time=5ns, Reverse Voltage=30V, RoHS=Yes, RoHS Compliant=Yes, Supplier 1=Digi-Key, Voltage Rating (DC)=30V, Width=1.35mm
FB1 FB2 FB3: "FERRITE CHIP BEAD 600 OHM SMD", Case Code (Imperial)=0805, Case Code (Metric)=2012, Current Rating=2A, DC Resistance (DCR)=100mR, Manufacturer=TDK, Package Quantity=1, Supplier Part Number 1=445-2206-1-ND, Case/Package=0805, Category="Ferrite Beads and Chips", ComponentLink1Description=https://datasheet.ciiva.com/46634/beads-commercial-power-mpz-en-46634335.pdf?src-supplier=Digi-Key, ComponentLink1URL=https://datasheet.ciiva.com/46634/beads-commercial-power-mpz-en-46634335.pdf?src-supplier=Digi-Key, ComponentLink2Description=https://datasheet.ciiva.com/46634/beads-commercial-power-mpz-en-46634377.pdf?src-supplier=Digi-Key, ComponentLink2URL=https://datasheet.ciiva.com/46634/beads-commercial-power-mpz-en-46634377.pdf?src-supplier=Digi-Key, ComponentLink3Description=https://datasheet.ciiva.com/46634/beads-commercial-power-mpz-en-46634606.pdf?src-supplier=Digi-Key, ComponentLink3URL=https://datasheet.ciiva.com/46634/beads-commercial-power-mpz-en-46634606.pdf?src-supplier=Digi-Key, Height=0.041inch, Impedance=600R, Lead Free="Lead Free", Length=0.079inch, Manufacturer Part Number=MPZ2012S601AT000, Max DC Current=2A, Mount="Surface Mount", Packaging="Tape and Reel", Pricing 1="1=0,11000, 10=0,09200, 25=0,08240, 50=0,06040, 100=0,05220, 250=0,04116, 500=0,03476, 1000=0,02928 (USD)", REACH SVHC="No SVHC", RoHS=Yes, RoHS Compliant=Yes, Series=MPZ, Supplier 1=Digi-Key, Width=0.049inch
FID1 FID2 FID3 FID4: "Fiducial 40mil Diameter, 120mil Mask"
J1 J3: library part M20-7820842, Supplier Part Number 1=952-1823-ND, Supplier 1=Digi-Key
J2: library part M20-7820646, Supplier Part Number 1=952-1809-ND, Supplier 1=Digi-Key
J4: library part M20-7821046, Supplier Part Number 1=952-1847-ND, Supplier 1=Digi-Key
J5 J6: library part 67997-106HLF, "CONN HEADER 6POS .100 STR 30AU", Manufacturer=ICC, Supplier Part Number 1=609-3393-ND, Category="Headers and Wire Housings", ComponentLink1Description=http://www.farnell.com/datasheets/1876884.pdf?src-supplier=Newark, ComponentLink1URL=http://www.farnell.com/datasheets/1876884.pdf?src-supplier=Newark, Manufacturer Part Number=67997-106HLF, Pricing 1="1=1,98000, 10=1,79800, 100=1,54090, 500=1,28408, 1000=1,10065, 5000=0,97591, 10000=0,95389 (USD)", RoHS=No, Supplier 1=Digi-Key
J7: "CONN USB MICRO B RECPT SMT R/A", Manufacturer="Amphenol ICC / FCI", Supplier Part Number 1=609-4616-1-ND, Category="USB Connectors", ComponentLink1Description=http://components.arrow.com/part/dataview/0323_04107372?src-supplier=Arrow+Europe, ComponentLink1URL=http://components.arrow.com/part/dataview/0323_04107372?src-supplier=Arrow+Europe, ComponentLink2Description=http://uk.rs-online.com/webdocs/1450/0900766b814507f1.pdf?src-supplier=RSComponents, ComponentLink2URL=http://uk.rs-online.com/webdocs/1450/0900766b814507f1.pdf?src-supplier=RSComponents, ComponentLink3Description=https://cdn.amphenol-icc.com/media/wysiwyg/files/documentation/datasheet/inputoutput/io_usb_micro.pdf?src-supplier=Avnet, ComponentLink3URL=https://cdn.amphenol-icc.com/media/wysiwyg/files/documentation/datasheet/inputoutput/io_usb_micro.pdf?src-supplier=Avnet, ComponentLink4Description=https://cdn.amphenol-icc.com/media/wysiwyg/files/documentation/datasheet/inputoutput/io_usb_micro.pdf?src-supplier=Arrow+Electronics, ComponentLink4URL=https://cdn.amphenol-icc.com/media/wysiwyg/files/documentation/datasheet/inputoutput/io_usb_micro.pdf?src-supplier=Arrow+Electronics, ComponentLink5Description=https://cdn.amphenol-icc.com/media/wysiwyg/files/documentation/datasheet/inputoutput/io_usb_micro.pdf?src-supplier=Onlinecomponents.com, ComponentLink5URL=https://cdn.amphenol-icc.com/media/wysiwyg/files/documentation/datasheet/inputoutput/io_usb_micro.pdf?src-supplier=Onlinecomponents.com, ComponentLink6Description=https://cdn.amphenol-icc.com/media/wysiwyg/files/documentation/datasheet/inputoutput/io_usb_micro.pdf?src-supplier=Verical, ComponentLink6URL=https://cdn.amphenol-icc.com/media/wysiwyg/files/documentation/datasheet/inputoutput/io_usb_micro.pdf?src-supplier=Verical, ComponentLink7Description=http://www.amphenol-icc.com/media/wysiwyg/files/drawing/10118193.pdf?src-supplier=Digi-Key, ComponentLink7URL=http://www.amphenol-icc.com/media/wysiwyg/files/drawing/10118193.pdf?src-supplier=Digi-Key, ComponentLink8Description=https://cdn.amphenol-icc.com/media/wysiwyg/files/documentation/datasheet/inputoutput/io_usb_micro.pdf?src-supplier=Digi-Key, ComponentLink8URL=https://cdn.amphenol-icc.com/media/wysiwyg/files/documentation/datasheet/inputoutput/io_usb_micro.pdf?src-supplier=Digi-Key, ComponentLink9Description=https://cdn.amphenol-icc.com/media/wysiwyg/files/documentation/datasheet/inputoutput/io_usb_micro.pdf?src-supplier=Mouser, ComponentLink9URL=https://cdn.amphenol-icc.com/media/wysiwyg/files/documentation/datasheet/inputoutput/io_usb_micro.pdf?src-supplier=Mouser, ComponentLink10Description=https://cdn.amphenol-icc.com/media/wysiwyg/files/documentation/datasheet/inputoutput/io_usb_micro.pdf?src-supplier=Allied+Electronics, ComponentLink10URL=https://cdn.amphenol-icc.com/media/wysiwyg/files/documentation/datasheet/inputoutput/io_usb_micro.pdf?src-supplier=Allied+Electronics, ComponentLink11Description=https://cdn.amphenol-icc.com/media/wysiwyg/files/documentation/datasheet/inputoutput/io_usb_micro.pdf?src-supplier=RSComponents, ComponentLink11URL=https://cdn.amphenol-icc.com/media/wysiwyg/files/documentation/datasheet/inputoutput/io_usb_micro.pdf?src-supplier=RSComponents, ComponentLink12Description=https://cdn.amphenol-icc.com/media/wysiwyg/files/documentation/datasheet/inputoutput/io_usb_micro.pdf?src-supplier=TTI, ComponentLink12URL=https://cdn.amphenol-icc.com/media/wysiwyg/files/documentation/datasheet/inputoutput/io_usb_micro.pdf?src-supplier=TTI, ComponentLink13Description=https://cdn.amphenol-icc.com/media/wysiwyg/files/documentation/datasheet/inputoutput/io_usb_micro.pdf?src-supplier=TME, ComponentLink13URL=https://cdn.amphenol-icc.com/media/wysiwyg/files/documentation/datasheet/inputoutput/io_usb_micro.pdf?src-supplier=TME, ComponentLink14Description=https://cdn.amphenol-icc.com/media/wysiwyg/files/documentation/datasheet/inputoutput/io_usb_micro.pdf?src-supplier=Heilind+Electronics, ComponentLink14URL=https://cdn.amphenol-icc.com/media/wysiwyg/files/documentation/datasheet/inputoutput/io_usb_micro.pdf?src-supplier=Heilind+Electronics, Manufacturer Part Number=10118193-0001LF, Pricing 1="1=0,44000, 10=0,41000, 25=0,36920, 50=0,32820, 100=0,31450, 250=0,28720, 500=0,27350 (USD)", RoHS=No, Stock 1=158669, Supplier 1=Digi-Key
J8 J9: library part PAD_WITH_HOLE_4MMx1.5MM, "Pad with a hole 4mm x 1.5mm"
JP1 JP4: library part 68000-103HLF, "BERGSTIK II .100\" SR STRAIGHT", Manufacturer="Amphenol ICC", Supplier Part Number 1=609-3461-ND, Category="Headers and Wire Housings", ComponentLink1Description=http://www.farnell.com/cad/1914865.pdf?src-supplier=Farnell, ComponentLink1URL=http://www.farnell.com/cad/1914865.pdf?src-supplier=Farnell, ComponentLink2Description=http://www.farnell.com/cad/1914865.pdf?src-supplier=Element14, ComponentLink2URL=http://www.farnell.com/cad/1914865.pdf?src-supplier=Element14, ComponentLink3Description=http://www.farnell.com/cad/1914865.pdf?src-supplier=Newark, ComponentLink3URL=http://www.farnell.com/cad/1914865.pdf?src-supplier=Newark, ComponentLink4Description=https://cdn.amphenol-icc.com/media/wysiwyg/files/drawing/68000.pdf?src-supplier=Digi-Key, ComponentLink4URL=https://cdn.amphenol-icc.com/media/wysiwyg/files/drawing/68000.pdf?src-supplier=Digi-Key, Manufacturer Part Number=68000-103HLF, Pricing 1="1=0,33000, 10=0,31000, 100=0,21700, 500=0,18602, 1000=0,15501, 5000=0,13287, 10000=0,12401 (USD)", RoHS=Yes, RoHS Compliant=Yes, Stock 1=62751, Supplier 1=Digi-Key
JP2: library part 68602-204HLF, "CONN HEADER 4POS .100 STR 15AU", Manufacturer="Amphenol ICC", Supplier Part Number 1=609-3369-ND, ComponentLink1Description=http://www.farnell.com/cad/1876884.pdf?src-supplier=Farnell, ComponentLink1URL=http://www.farnell.com/cad/1876884.pdf?src-supplier=Farnell, Manufacturer Part Number=68602-204HLF, Pricing 1="1=0,35000, 10=0,33500, 100=0,23450 (USD)", RoHS=No, Stock 1=148, Supplier 1=Digi-Key
JP3: library part 68001-204HLF, "CONN HEADER 4POS .100 STR 15AU", Manufacturer=ICC, Supplier Part Number 1=609-3402-ND, Category="Headers and Wire Housings", Manufacturer Part Number=68001-204HLF, Pricing 1="1=0.42000, 10=0.39800, 100=0.27890, 500=0.23904, 1000=0.19920, 5000=0.17074, 10000=0.15936 (USD)", RoHS=No, Stock 1=1837, Supplier 1=Digi-Key
L1: library part L1210R2R2MDWIT, "FIXED IND 2.2UH 2A 80 MOHM SMD", Case Code (Imperial)=1210, Case Code (Metric)=3225, Current Rating=2A, DC Current=1.13A, DC Resistance (DCR)=80mR, Inductance=2.2uH, Inductance Tolerance=20%, Manufacturer=KEMET, Max Operating Temperature=105°C, Min Operating Temperature=-40°C, Package Quantity=1000, Resistor Type=Wirewound,Ceramic, Self Resonant Frequency=190MHz, Supplier Part Number 1=399-9598-1-ND, Test Frequency=100kHz, Case/Package=1210, Category="Fixed Inductors", ComponentLink1Description=https://datasheet.ciiva.com/8512/f3115-8512543.pdf?src-supplier=Avnet, ComponentLink1URL=https://datasheet.ciiva.com/8512/f3115-8512543.pdf?src-supplier=Avnet, ComponentLink2Description=https://datasheet.ciiva.com/6691/f3115-6691487.pdf?src-supplier=Digi-Key, ComponentLink2URL=https://datasheet.ciiva.com/6691/f3115-6691487.pdf?src-supplier=Digi-Key, ComponentLink3Description=https://datasheet.ciiva.com/4957/f3115-4957838.pdf?src-supplier=Mouser, ComponentLink3URL=https://datasheet.ciiva.com/4957/f3115-4957838.pdf?src-supplier=Mouser, ComponentLink4Description=https://datasheet.ciiva.com/17280/f3115-17280270.pdf?src-supplier=Avnet+Europe, ComponentLink4URL=https://datasheet.ciiva.com/17280/f3115-17280270.pdf?src-supplier=Avnet+Europe, ComponentLink5Description=https://datasheet.ciiva.com/22685/27262-22685038.pdf?src-supplier=Element14, ComponentLink5URL=https://datasheet.ciiva.com/22685/27262-22685038.pdf?src-supplier=Element14, Core Material=Ferrite, Depth=2.7mm, Height=2.5mm, Height - Seated (Max)=0.106inch, Length=0.126inch, Manufacturer Part Number=L1210R2R2MDWIT, Max DC Current=2A, Military Standard=Not, Mount="Surface Mount", Packaging="Tape and Reel", Pricing 1="1=0,50000, 10=0,43700, 25=0,40600, 50=0,34360, 100=0,31240, 250=0,29364, 500=0,26240 (USD)", Radiation Hardening=No, REACH SVHC="No SVHC", RoHS=Yes, RoHS Compliant=Yes, Series=L-DWI, Shielding=Unshielded, Stock 1=13833, Supplier 1=Digi-Key, Termination=SMD/SMT, Tolerance=20%, Width=0.098inch
MH1 MH2 MH3: "Mounting Hole 7.4mm Diameter, 3.2mm Drill"
MH4: "Hole 7.4mm Diameter (Non Copper), 3.2mm Drill NPTH"
R1: library part RC0805FR-07100KL, "RES SMD 100K OHM 1% 1/8W 0805", Case Code (Imperial)=0805, Case Code (Metric)=2012, Manufacturer=Yageo, Max Operating Temperature=155°C, Max Power Dissipation=125mW, Min Operating Temperature=-55°C, Package Quantity=1, Resistance=100kR, Resistance Tolerance=1%, Resistor Type="Thick Film", Supplier Part Number 1=311-100KCRCT-ND, Temperature Coefficient=100ppm/°C, Voltage Rating=150V, Case/Package=0805, Category="Chip SMD Resistors", ComponentLink1Description=https://datasheet.ciiva.com/11808/0900766b8106beab-11808858.pdf?src-supplier=RSComponents, ComponentLink1URL=https://datasheet.ciiva.com/11808/0900766b8106beab-11808858.pdf?src-supplier=RSComponents, ComponentLink2Description=https://datasheet.ciiva.com/7941/1686128-7941677.pdf?src-supplier=Element14, ComponentLink2URL=https://datasheet.ciiva.com/7941/1686128-7941677.pdf?src-supplier=Element14, ComponentLink3Description=https://datasheet.ciiva.com/7660/38627-7660796.pdf?src-supplier=Element14, ComponentLink3URL=https://datasheet.ciiva.com/7660/38627-7660796.pdf?src-supplier=Element14, ComponentLink4Description=https://datasheet.ciiva.com/22747/444164-22747534.pdf?src-supplier=Element14, ComponentLink4URL=https://datasheet.ciiva.com/22747/444164-22747534.pdf?src-supplier=Element14, ComponentLink5Description=https://datasheet.ciiva.com/2457/pyu-r-int-thick-7-2457018.pdf?src-supplier=Digi-Key, ComponentLink5URL=https://datasheet.ciiva.com/2457/pyu-r-int-thick-7-2457018.pdf?src-supplier=Digi-Key, ComponentLink6Description=https://datasheet.ciiva.com/2457/pyu-r-int-thick-7-2457019.pdf?src-supplier=Digi-Key, ComponentLink6URL=https://datasheet.ciiva.com/2457/pyu-r-int-thick-7-2457019.pdf?src-supplier=Digi-Key, ComponentLink7Description=https://datasheet.ciiva.com/2457/pyu-r-int-thick-7-2457017.pdf?src-supplier=Digi-Key, ComponentLink7URL=https://datasheet.ciiva.com/2457/pyu-r-int-thick-7-2457017.pdf?src-supplier=Digi-Key, ComponentLink8Description=https://datasheet.ciiva.com/12667/rc0805-12667001.pdf?src-supplier=Mouser, ComponentLink8URL=https://datasheet.ciiva.com/12667/rc0805-12667001.pdf?src-supplier=Mouser, ComponentLink9Description=https://datasheet.ciiva.com/7941/1697719-7941676.pdf?src-supplier=Element14, ComponentLink9URL=https://datasheet.ciiva.com/7941/1697719-7941676.pdf?src-supplier=Element14, ComponentLink10Description=https://datasheet.ciiva.com/7941/1697719-7941678.pdf?src-supplier=Element14, ComponentLink10URL=https://datasheet.ciiva.com/7941/1697719-7941678.pdf?src-supplier=Element14, ComponentLink11Description=https://datasheet.ciiva.com/16747/rc0805-16747226.pdf?src-supplier=Future+Electronics, ComponentLink11URL=https://datasheet.ciiva.com/16747/rc0805-16747226.pdf?src-supplier=Future+Electronics, Construction=Rectangular, Depth=1.25mm, Features="Moisture Resistant", Height=0.024inch, Lead Free="Lead Free", Lead Pitch=0.4mm, Length=2mm, Manufacturer Part Number=RC0805FR-07100KL, Military Standard=Not, Number of Pins=2, Number of Terminations=2, Packaging="Tape and Reel", Power Rating=125mW, Pricing 1="1=0,10000, 10=0,04200, 100=0,01690, 1000=0,00759, 2500=0,00659 (USD)", REACH SVHC=Unknown, RoHS=Yes, RoHS Compliant=Yes, Series=RC, Size Code=0805, Supplier 1=Digi-Key, Technology="THICK FILM", Termination=SMD/SMT, Tolerance=1%, Voltage Rating (DC)=150V, Width=0.049inch
R2 R3 R15 R17 R22: library part RC0805FR-07560RL, "RES SMD 560 OHM 1% 1/8W 0805", Case Code (Imperial)=0805, Case Code (Metric)=2012, Manufacturer=Yageo, Max Operating Temperature=155°C, Max Power Dissipation=125mW, Min Operating Temperature=-55°C, Package Quantity=1, Resistance Tolerance=1%, Resistor Type="Thick Film", Supplier Part Number 1=311-560CRCT-ND, Temperature Coefficient=100ppm/°C, Voltage Rating=150V, Case/Package=0805, Category="Chip SMD Resistors", ComponentLink1Description=https://datasheet.ciiva.com/2457/pyu-r-int-thick-7-2457141.pdf?src-supplier=Digi-Key, ComponentLink1URL=https://datasheet.ciiva.com/2457/pyu-r-int-thick-7-2457141.pdf?src-supplier=Digi-Key, ComponentLink2Description=https://datasheet.ciiva.com/2457/pyu-r-int-thick-7-2457142.pdf?src-supplier=Digi-Key, ComponentLink2URL=https://datasheet.ciiva.com/2457/pyu-r-int-thick-7-2457142.pdf?src-supplier=Digi-Key, ComponentLink3Description=https://datasheet.ciiva.com/2457/pyu-r-int-thick-7-2457140.pdf?src-supplier=Digi-Key, ComponentLink3URL=https://datasheet.ciiva.com/2457/pyu-r-int-thick-7-2457140.pdf?src-supplier=Digi-Key, ComponentLink4Description=https://datasheet.ciiva.com/5561/rc0805-5561861.pdf?src-supplier=Mouser, ComponentLink4URL=https://datasheet.ciiva.com/5561/rc0805-5561861.pdf?src-supplier=Mouser, ComponentLink5Description=https://datasheet.ciiva.com/7941/444164-7941814.pdf?src-supplier=Element14, ComponentLink5URL=https://datasheet.ciiva.com/7941/444164-7941814.pdf?src-supplier=Element14, ComponentLink6Description=https://datasheet.ciiva.com/7941/444164-7941813.pdf?src-supplier=Element14, ComponentLink6URL=https://datasheet.ciiva.com/7941/444164-7941813.pdf?src-supplier=Element14, Construction=Rectangular, Depth=1.25mm, Features="Moisture Resistant", Height=0.024inch, Lead Free="Lead Free", Length=2mm, Manufacturer Part Number=RC0805FR-07560RL, Military Standard=Not, Number of Terminations=2, Packaging="Tape and Reel", Power Rating=125mW, Pricing 1="1=0.10000, 10=0.04200, 100=0.01690, 1000=0.00759, 2500=0.00659 (USD)", REACH SVHC=Unknown, Resistance=560R, RoHS=Yes, RoHS Compliant=Yes, Series=RC, Size Code=0805, Supplier 1=Digi-Key, Termination=SMD/SMT, Tolerance=1%, Weight=0.000194oz, Width=0.049inch
R4 R14 R18 R19 R20 R21: library part RC0805FR-0710KL, "RES SMD 10K OHM 1% 1/8W 0805", Case Code (Imperial)=0805, Case Code (Metric)=2012, Manufacturer=Yageo, Max Operating Temperature=155°C, Max Power Dissipation=125mW, Min Operating Temperature=-55°C, Package Quantity=1, Resistance=10kR, Resistance Tolerance=1%, Resistor Type="Thick Film", Supplier Part Number 1=311-10.0KCRCT-ND, Temperature Coefficient=100ppm/°C, Voltage Rating=150V, Case/Package=0805, Category="Chip SMD Resistors", ComponentLink1Description=https://datasheet.ciiva.com/11808/0900766b8106beab-11808151.pdf?src-supplier=RSComponents, ComponentLink1URL=https://datasheet.ciiva.com/11808/0900766b8106beab-11808151.pdf?src-supplier=RSComponents, ComponentLink2Description=https://datasheet.ciiva.com/12669/rc0805-12669688.pdf?src-supplier=Mouser, ComponentLink2URL=https://datasheet.ciiva.com/12669/rc0805-12669688.pdf?src-supplier=Mouser, ComponentLink3Description=https://datasheet.ciiva.com/2456/pyu-r-int-thick-7-2456974.pdf?src-supplier=Digi-Key, ComponentLink3URL=https://datasheet.ciiva.com/2456/pyu-r-int-thick-7-2456974.pdf?src-supplier=Digi-Key, ComponentLink4Description=https://datasheet.ciiva.com/2456/pyu-r-int-thick-7-2456972.pdf?src-supplier=Digi-Key, ComponentLink4URL=https://datasheet.ciiva.com/2456/pyu-r-int-thick-7-2456972.pdf?src-supplier=Digi-Key, ComponentLink5Description=https://datasheet.ciiva.com/2456/pyu-r-int-thick-7-2456973.pdf?src-supplier=Digi-Key, ComponentLink5URL=https://datasheet.ciiva.com/2456/pyu-r-int-thick-7-2456973.pdf?src-supplier=Digi-Key, ComponentLink6Description=https://datasheet.ciiva.com/16747/rc0805-16747087.pdf?src-supplier=Future+Electronics, ComponentLink6URL=https://datasheet.ciiva.com/16747/rc0805-16747087.pdf?src-supplier=Future+Electronics, ComponentLink7Description=https://datasheet.ciiva.com/46447/444164-46447563.pdf?src-supplier=Element14, ComponentLink7URL=https://datasheet.ciiva.com/46447/444164-46447563.pdf?src-supplier=Element14, Construction=Rectangular, Depth=1.25mm, Features="Moisture Resistant", Height=0.024inch, Lead Free="Lead Free", Length=2mm, Manufacturer Part Number=RC0805FR-0710KL, Military Standard=Not, Number of Terminations=2, Packaging="Tape and Reel", Power Rating=125mW, Pricing 1="1=0,10000, 10=0,04200, 100=0,01690, 1000=0,00759, 2500=0,00659 (USD)", REACH SVHC=Unknown, RoHS=Yes, RoHS Compliant=Yes, Series=RC, Size Code=0805, Stock 1=8719534, Supplier 1=Digi-Key, Technology="THICK FILM", Termination=SMD/SMT, Tolerance=1%, Width=0.049inch